# EAGLE board mouse1351r3-singlesided (EAGLE 5.04)
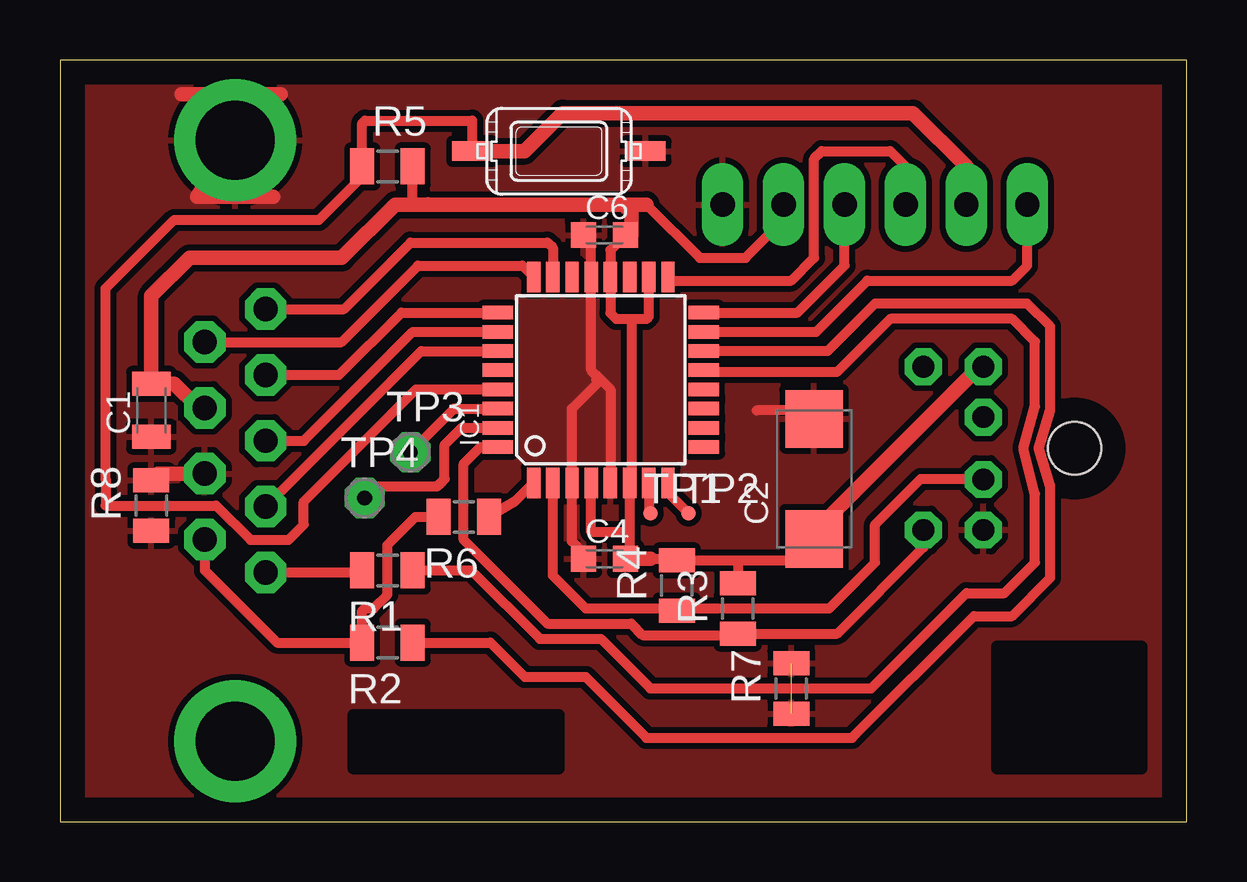
[diagram p0: board, top side]
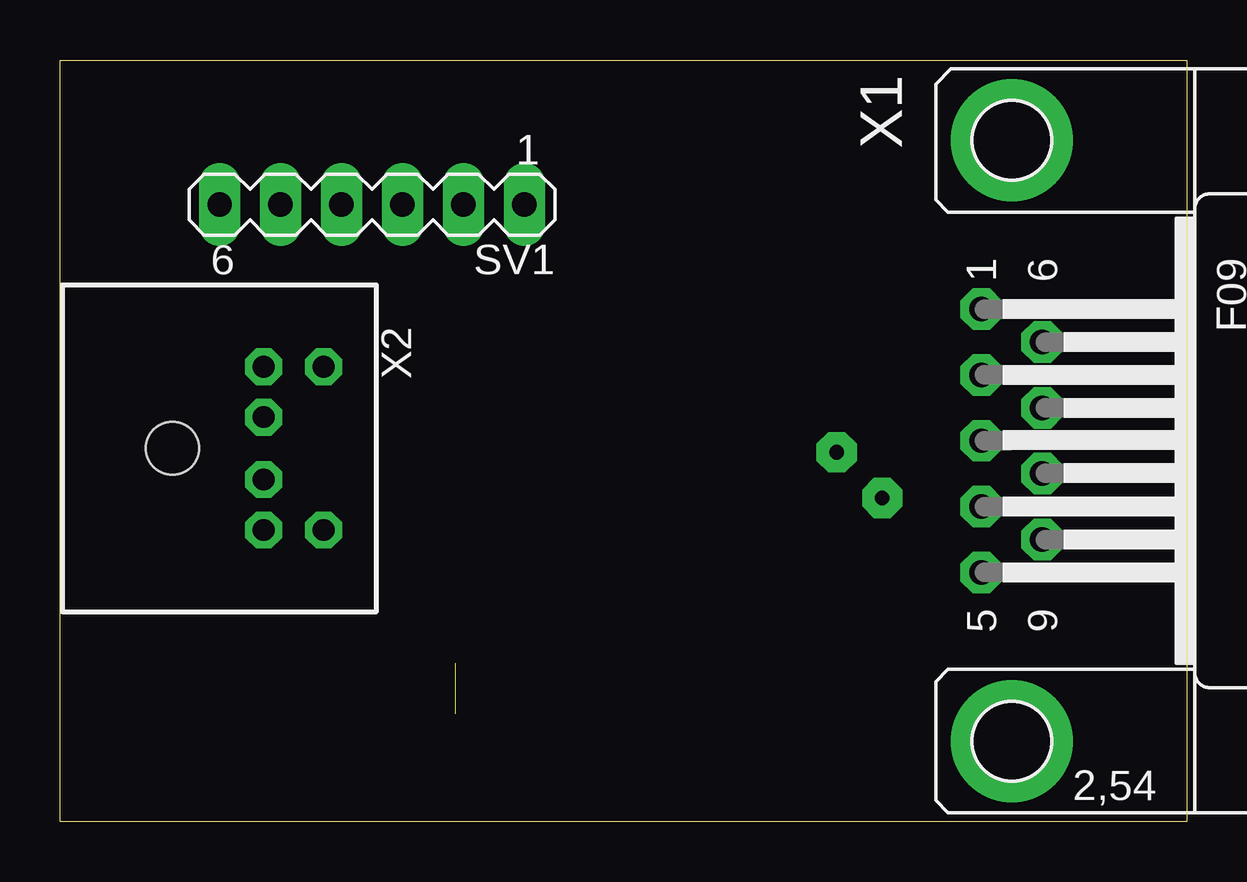
[diagram p1: board, bottom side, seen from below]

Size 46.98 x 31.74 mm. Coordinates in mm from the lower left corner, seen from the top.
Outline: 0,0 46.98,0 46.98,31.74 0,31.74 0,0
Copper layers (1*16): Top 0.035mm / dielectric 1.5mm / Bottom 0.035mm
Design rules "default *": minimum track width 10mil, minimum drill 0.5mm, track to track 8mil, track to pad 8mil, pad to pad 8mil, via to via 8mil, smd to smd 8mil, copper to edge 40mil, drill to drill 8mil, minimum pad ring 10mil, minimum via ring 8mil, stop-mask expansion 4mil, vias tented up to drill 0mil, thermal gap 10mil
tRestrict: area 12.2,2.2 to 20.8,4.4; area 39.1,2.2 to 45.1,7.3

## Footprints (pad centres in the part's own frame; a part is rotated, then mirrored left to right if it is on the bottom)
C0805K = smd 1 x 1.6: 1 -1.1,0; 2 1.1,0
SMC_C = smd 2.4 x 2.4: + -2.5,0; - 2.5,0
C0603K = smd 1.05 x 1.08: 1 -0.875,0; 2 0.875,0
TQFP32-08 = smd 1.27 x 0.559: 1 -4.293,2.8; 2 -4.293,2; 3 -4.293,1.2; 4 -4.293,0.4; 5 -4.293,-0.4; 6 -4.293,-1.2; 7 -4.293,-2; 8 -4.293,-2.8; 17 4.293,-2.8; 18 4.293,-2; 19 4.293,-1.2; 20 4.293,-0.4; 21 4.293,0.4; 22 4.293,1.2; 23 4.293,2; 24 4.293,2.8 | smd 0.559 x 1.27: 9 -2.8,-4.293; 10 -2,-4.293; 11 -1.2,-4.293; 12 -0.4,-4.293; 13 0.4,-4.293; 14 1.2,-4.293; 15 2,-4.293; 16 2.8,-4.293; 25 2.8,4.293; 26 2,4.293; 27 1.2,4.293; 28 0.4,4.293; 29 -0.4,4.293; 30 -1.2,4.293; 31 -2,4.293; 32 -2.8,4.293
R0805 = smd 1 x 1.5: 1 -1.05,0; 2 1.05,0
MA06-1 = drill 1.016 long: 1 -6.35,0; 2 -3.81,0; 3 -1.27,0; 4 1.27,0; 5 3.81,0; 6 6.35,0
SW_IT1181 = smd 1.676 x 0.813: P$1 -3.61,0; P$2 3.61,0
TP06R = smd 0.6 x 0.6: TP 0,0
P1-13 = drill 0.61 pad 1.676 octagon: 1 0,0
F09HP = drill 1.016 octagon: 1 -5.486,-1.27; 2 -2.743,-1.27; 3 0,-1.27; 4 2.743,-1.27; 5 5.486,-1.27; 6 -4.115,1.27; 7 -1.372,1.27; 8 1.372,1.27; 9 4.115,1.27 | drill 3.302 pad 5.08 round: G1 -12.522,0; G2 12.522,0
SSV-BC06 = drill 0.9 octagon: 1 1.3,8.5; 2 -1.3,8.5; 3 3.4,8.5; 4 -3.4,8.5; 5 3.4,11; 6 -3.4,11 | hole 2.2: 0,4.7

## Placement (x,y rotation side)
C1  4.7uF  [C0805K]  3.81,17.14 90 top
C2  [SMC_C]  31.43,14.29 90 top
C4  0.1  [C0603K]  22.7,10.95 0 top
C6  0.1  [C0603K]  22.7,24.45 0 top
IC1  MEGA8-AI  [TQFP32-08]  22.54,18.41 90 top
R1  10K  [R0805]  13.65,10.48 180 top
R2  10K  [R0805]  13.65,7.46 180 top
R3  10K  [R0805]  28.26,8.89 90 top
R4  10K  [R0805]  25.72,9.84 90 top
R5  10K  [R0805]  13.65,27.3 0 top
R6  0  [R0805]  16.83,12.7 180 top
R7  0  [R0805]  30.48,5.56 90 top
R8  0  [R0805]  3.81,13.18 90 top
SV1  [MA06-1]  33.97,25.72 180 bottom
SW1  BUTTON-IT_1181  [SW_IT1181]  20.8,27.94 180 top
TP1  TPSTP06R  [TP06R]  24.61,12.86 0 top
TP2  TPSTP06R  [TP06R]  26.19,12.86 0 top
TP3  TPSPAD1-13  [P1-13]  14.6,15.4 0 top
TP4  TPSPAD1-13  [P1-13]  12.7,13.49 0 top
X1  [F09HP]  7.3,15.88 270 bottom
X2  [SSV-BC06]  46.99,15.56 270 bottom

## Library data of the parts
C1 C2 C4 C6 R1-R8 = rcl
IC1 = atmel
SV1 = con-lstb
SW1 TP1-TP4 X2 = 0-svo
X1 = con-subd

## Nets
+5V: C1.2 C2.+ C4.2 C6.2 IC1.4 IC1.6 IC1.18 IC1.20 R3.2 R4.2 R5.2 SV1.2 X1.7 X2.4
DOWN: IC1.25 X1.2
FIRE: IC1.24 X1.6
GND: C1.1 C2.- C4.1 C6.1 IC1.3 IC1.5 IC1.21 R7.1 R7.2 R8.1 R8.2 SV1.1 SW1.P$1 X1.8 X1.G1 X2.3
LEFT: IC1.26 X1.3
MISO: IC1.16 SV1.3
MOSI: IC1.15 SV1.6
N$1: IC1.1 R6.1
N$2: IC1.7 TP1.TP
N$3: IC1.8 TP2.TP
N$4: IC1.13 R1.1
N$5: IC1.14 R2.1
POTX: R2.2 R6.2 X1.9
POTY: R1.2 X1.5
PS2CLK: IC1.32 R3.1 X2.5
PS2DAT: IC1.2 R4.1 X2.1
RESET: IC1.29 R5.1 SV1.5 SW1.P$2
RIGHT: IC1.27 X1.4
RXD: IC1.30 TP3.1
SCK: IC1.17 SV1.4
TXD: IC1.31 TP4.1
UP: IC1.23 X1.1

## Tracks (layer width: path | path; a pad name or v marks a point on that pad's centre or on a via)
+5V
  Top 0.305: IC1.20 22.79,22.54 | 23.81,24.45 C6.2
  Top 0.406: IC1.4 22.14,12.07 23.49,12.07 23.74,12.31 IC1.6 | 23.65,10.95 C4.2 23.74,11.12 IC1.6 | C6.2 22.94,23.81 IC1.20 22.94,21.19 23.18,20.95 23.81,20.95 | IC1.18 24.54,21.05 24.45,20.95 23.81,20.95 | 23.81,20.95 23.81,14.19 IC1.6 | 15.24,25.72 15.34,25.81 | C2.+ 31.43,10.8 31.33,10.89 28.26,10.89 | 38.32,18.96 X2.4 | R5.2 14.7,25.81 14.92,25.72 | 24.45,25.72 26.67,23.5 28.57,23.5 30.16,25.08 SV1.2 | 24.61,10.95 25.66,10.95 R4.2 28.26,10.89 | 28.26,10.89 R3.2
  Top 0.61: C6.2 23.65,24.52 | 23.49,25.72 15.24,25.72 14.92,25.72 13.97,25.72 11.75,23.5 5.4,23.5 3.81,21.91 C1.2 3.5,18.26 4.76,18.26 5.77,17.25 X1.7 | 23.49,25.72 24.45,25.72 | 23.81,24.45 23.81,25.4 23.49,25.72 | 38.32,18.96 32.07,12.7 32.07,12.42 C2.+ | C4.2 24.61,10.95
DOWN
  Top 0.406: X1.2 11.63,18.62 14.23,21.21 IC1.25
FIRE
  Top 0.406: X1.6 11.73,19.99 14.92,23.18 19.27,23.18 IC1.24
GND  (1 unrouted)
  Top 0.305: 22.29,18.41 22.54,18.41 22.79,18.16 | C6.1 21.75,24.37 | IC1.5 22.79,14.22
  Top 0.406: IC1.5 22.94,18.02 22.54,18.41 | 22.54,18.41 21.34,17.21 IC1.3 21.34,11.68 21.83,11.19 C4.1 | 22.54,18.41 22.14,18.81 IC1.21 22.14,24.13 C6.1 | 29.05,17.14 31.39,17.14 C2.-
  Top 0.61: 4.08,14.5 X1.8 | 5.08,30.32 9.21,30.32 | 8.89,26.04 5.71,26.04 X1.G1
  pour Top (isolate 0.254): -0.32,31.75 47.31,31.75 47.31,0 -0.32,0
LEFT
  Top 0.406: IC1.26 14.7,20.41 10.16,15.88 X1.3
MISO
  Top 0.406: IC1.16 30.74,21.21 32.7,23.18 SV1.3
MOSI
  Top 0.406: IC1.15 31.53,20.41 33.65,22.54 39.69,22.54 40.32,23.18 SV1.6
N$1
  Top 0.406: 19.69,13.97 19.74,14.03 IC1.1 18.96,13.34 R6.1
N$2
  Top 0.406: IC1.7 24.54,12.92 TP1.TP
N$3
  Top 0.406: IC1.8 25.34,13.71 TP2.TP
N$4
  Top 0.406: IC1.13 26.92,18.73 32.39,18.73 34.61,20.95 39.69,20.95 40.64,20 40.64,17.3 40.16,15.56 40.64,13.65 40.64,10.8 39.37,9.52 37.78,9.52 33.81,5.56 24.61,5.56 22.54,7.62 20,7.62 17.14,10.48 R1.1
N$5
  Top 0.406: IC1.14 32,19.61 33.97,21.59 40.32,21.59 41.28,20.64 41.28,17.14 40.8,15.56 41.28,13.97 41.28,10.16 39.69,8.57 38.1,8.57 33.02,3.49 24.45,3.49 21.91,6.03 19.37,6.03 17.94,7.46 R2.1
POTX
  Top 0.406: X1.9 6.03,10.48 9.05,7.46 R2.2 12.6,8.79 12.7,8.89 13.08,8.89 13.65,9.46 13.65,11.54 14.81,12.7 R6.2
POTY
  Top 0.406: X1.5 12.51,10.39 R1.2
PS2CLK
  Top 0.406: IC1.32 17.52,15.61 16.83,14.92 16.83,11.75 20.32,8.25 23.81,8.25 24.29,7.78 28.2,7.78 R3.1 32.4,7.84 35.99,11.43 X2.5
PS2DAT
  Top 0.406: X2.1 38.46,14.29 35.88,14.29 33.97,12.38 33.97,10.8 32.07,8.89 25.72,8.89 | IC1.2 20.54,10.25 21.91,8.89 25.72,8.89 | 25.72,8.89 R4.1
RESET
  Top 0.406: IC1.29 14.84,18.02 10.16,13.34 10.16,12.38 9.52,11.75 7.94,11.75 6.51,13.18 1.9,13.18 1.91,14.29 1.91,22.22 4.76,25.08 10.8,25.08 12.7,26.99 12.7,27.21 R5.1 12.6,29.11 12.7,29.21 17.19,29.21 SW1.P$2
  Top 0.61: SW1.P$2 19.37,27.94 20.96,29.53 35.56,29.53 37.78,27.3 SV1.5
RIGHT
  Top 0.406: IC1.27 15.06,19.61 X1.4
RXD
  Top 0.406: IC1.30 16.42,17.21 TP3.1
SCK
  Top 0.406: IC1.17 25.49,22.54 30.48,22.54 31.43,23.5 31.43,27.62 31.75,27.94 34.61,27.94 35.24,27.3 SV1.4
TXD
  Top 0.406: IC1.31 16.73,16.41 16.03,15.72 16.03,14.29 15.87,14.13 | 15.87,14.13 | 15.87,14.13 15.72,13.97 13.18,13.97 TP4.1
UP
  Top 0.406: IC1.23 20.54,23.91 20.32,24.13 14.6,24.13 11.84,21.36 X1.1

## Text on the board
201bmp: 2009 | M | OUSE